# Altium PCB Holder_Accu_Simetric.PcbDoc
Units mm, origin at the board's own origin, x right, y up, seen from the top; angles counter-clockwise.
Board outline 356.65 x 138 mm, 2 copper layers (Top Layer, Bottom Layer); 22 components, 17 nets, 105 pads, 29 vias.
Unrouted connection lines stored in the file: 15.
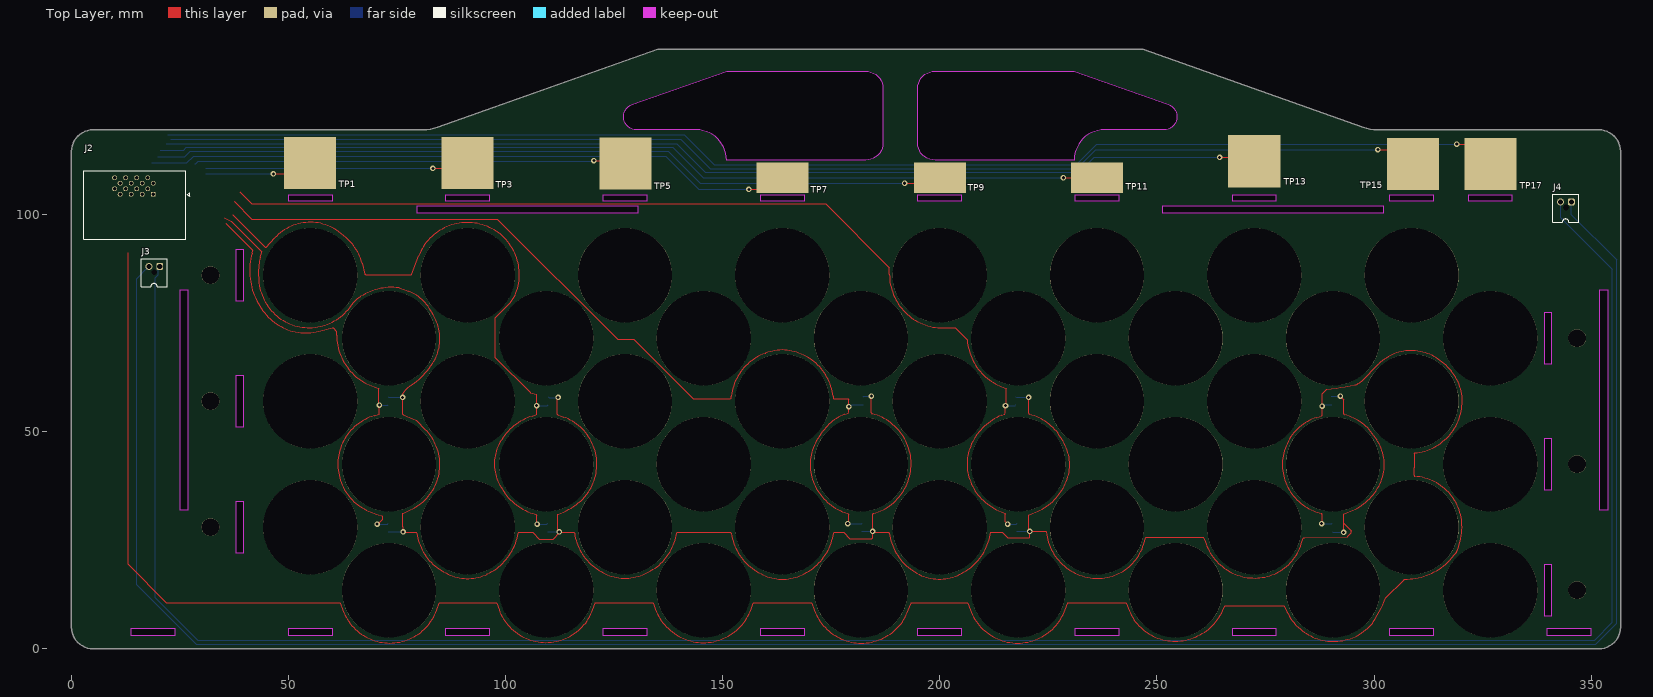
[diagram p0: Top Layer view]
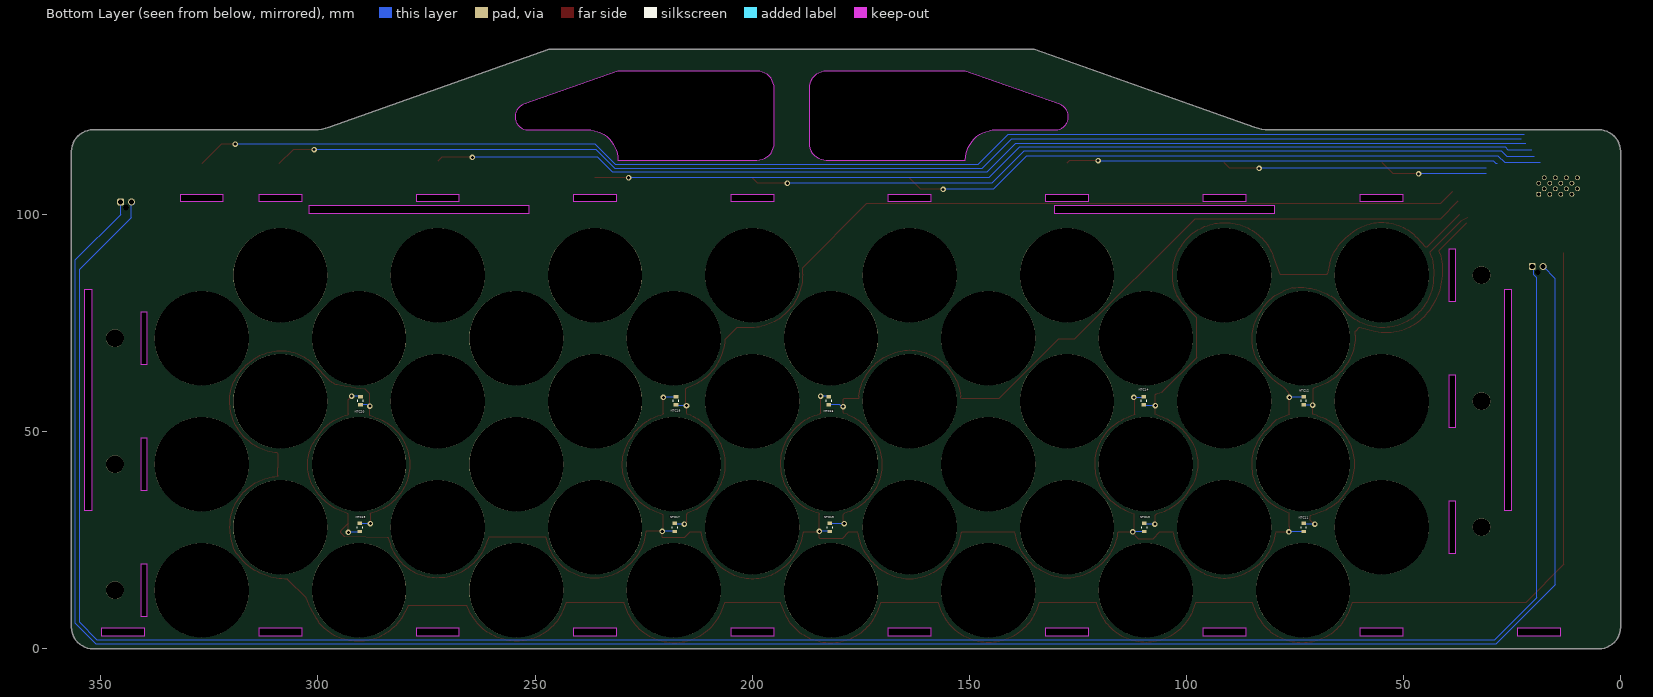
[diagram p1: Bottom Layer view, seen from below]
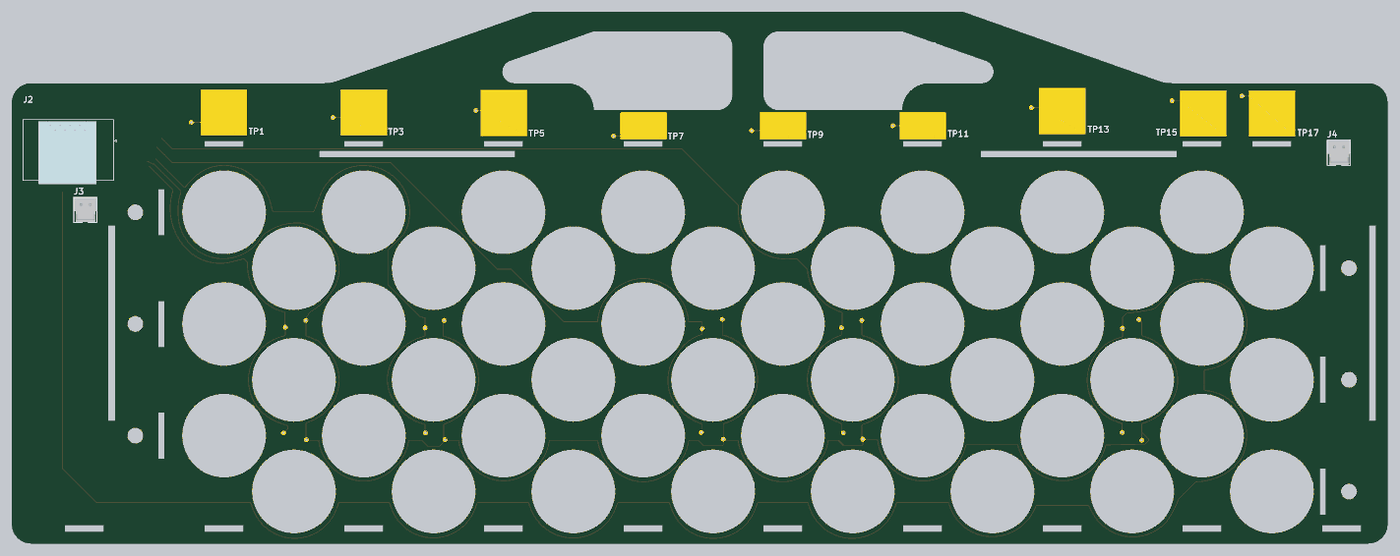
[diagram p2: 3D render of the assembled board from above, using the file's embedded part models]
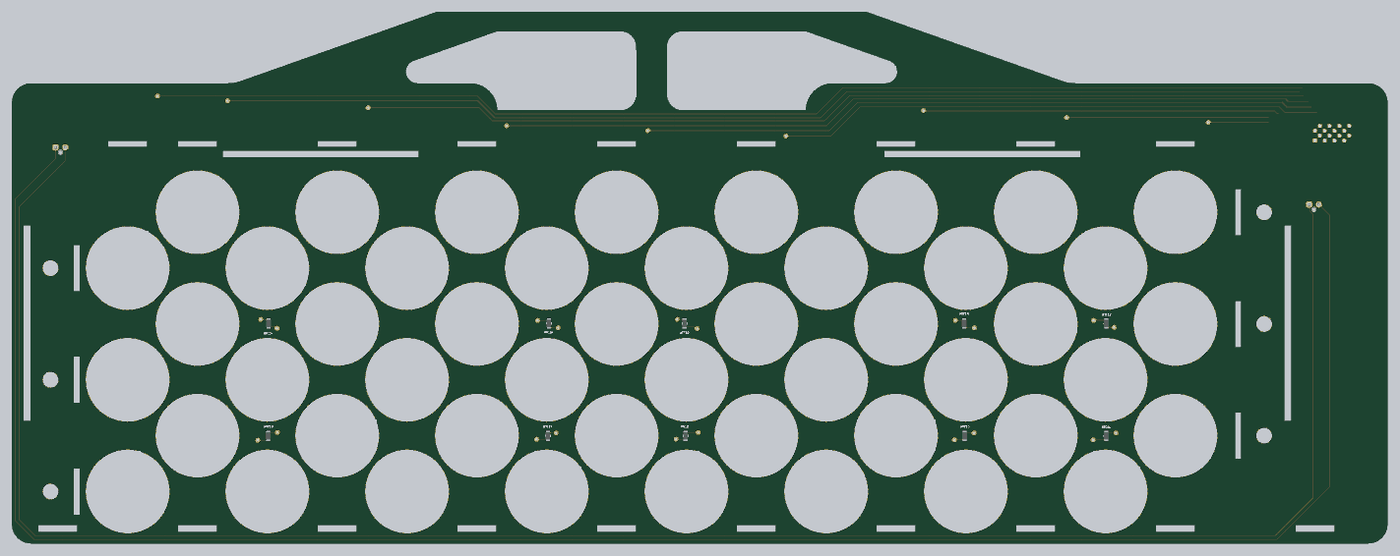
[diagram p3: 3D render of the assembled board from below, using the file's embedded part models]

## Layer stack, top to bottom
Top Solder: solder mask 0.0102, Solder Resist, Dk 3.5
Top Layer: signal copper 0.0356
Dielectric 1: dielectric 0.32, FR-4, Dk 4.8
Bottom Layer: signal copper 0.0356
Bottom Solder: solder mask 0.0102, Solder Resist, Dk 3.5

## Board outline
135.069,138 84.402,120.073 83.59,119.824 82.759,119.644 81.916,119.536 81.067,119.5 5.092,119.5 4.44,119.457 3.798,119.33 3.179,119.119 2.592,118.83 2.049,118.467 1.557,118.036 1.126,117.544 0.762,117 0.473,116.413 0.263,115.794 0.135,115.153 0.092,114.5 0.092,5 0.135,4.347 0.263,3.706 0.473,3.087 0.762,2.5 1.126,1.956 1.557,1.464 2.049,1.033 2.592,0.67 3.179,0.381 3.798,0.17 4.44,0.043 5.092,0 351.743,0 352.396,0.043 353.037,0.17 353.656,0.381 354.243,0.67 354.787,1.033 355.278,1.464 355.71,1.956 356.073,2.5 356.362,3.087 356.573,3.706 356.7,4.347 356.743,5 356.743,114.5 356.7,115.153 356.573,115.794 356.362,116.413 356.073,117 355.71,117.544 355.278,118.036 354.787,118.467 354.243,118.83 353.656,119.119 353.037,119.33 352.396,119.457 351.743,119.5 300.769,119.5 299.92,119.536 299.077,119.644 298.246,119.824 297.433,120.073 246.766,138
cut-out: 50.092,4.75 60.092,4.75 60.092,3 50.092,3
cut-out: 303.632,3 303.632,4.75 313.632,4.75 313.632,3
cut-out: 340.743,7.5 339.243,7.5 339.243,19.5 340.743,19.5
cut-out: 39.592,22 38.092,22 38.092,34 39.592,34
cut-out: 340.743,36.5 339.243,36.5 339.243,48.5 340.743,48.5
cut-out: 39.592,51 38.092,51 38.092,63 39.592,63
cut-out: 339.852,4.75 349.852,4.75 349.852,3 339.852,3
cut-out: 267.412,4.75 277.412,4.75 277.412,3 267.412,3
cut-out: 194.972,4.75 204.972,4.75 204.972,3 194.972,3
cut-out: 122.532,4.75 132.532,4.75 132.532,3 122.532,3
cut-out: 25.092,31.875 25.092,82.625 26.842,82.625 26.842,31.875
cut-out: 302.118,102 302.118,100.25 251.368,100.25 251.368,102
cut-out: 79.717,102 130.467,102 130.467,100.25 79.717,100.25
cut-out: 351.993,82.625 353.743,82.625 353.743,31.875 351.993,31.875
cut-out: 50.092,104.5 60.092,104.5 60.092,103 50.092,103
cut-out: 86.312,104.5 96.312,104.5 96.312,103 86.312,103
cut-out: 122.532,104.5 132.532,104.5 132.532,103 122.532,103
cut-out: 158.752,104.5 168.752,104.5 168.752,103 158.752,103
cut-out: 231.192,104.5 241.192,104.5 241.192,103 231.192,103
cut-out: 267.412,104.5 277.412,104.5 277.412,103 267.412,103
cut-out: 303.632,104.5 313.632,104.5 313.632,103 303.632,103
cut-out: 339.243,77.5 340.743,77.5 340.743,65.5 339.243,65.5
cut-out: 38.092,92 39.592,92 39.592,80 38.092,80
cut-out: 241.192,4.75 241.192,3 231.192,3 231.192,4.75
cut-out: 168.752,4.75 168.752,3 158.752,3 158.752,4.75
cut-out: 96.312,4.75 96.312,3 86.312,3 86.312,4.75
cut-out: 23.872,4.75 23.872,3 13.872,3 13.872,4.75
cut-out: 321.743,104.5 331.743,104.5 331.743,103 321.743,103
cut-out: 194.972,104.5 204.972,104.5 204.972,103 194.972,103
cut-out: 186.918,129 186.918,116.5 186.868,115.874 186.722,115.264 186.482,114.684 186.154,114.149 185.746,113.672 185.269,113.264 184.734,112.936 184.154,112.696 183.543,112.549 182.918,112.5 150.918,112.5 150.874,113.284 150.742,114.058 150.525,114.812 150.225,115.537 149.845,116.224 149.391,116.864 148.867,117.45 148.282,117.973 147.642,118.427 146.955,118.807 146.23,119.107 145.475,119.324 144.701,119.456 143.918,119.5 130.236,119.5 129.715,119.546 129.21,119.681 128.736,119.902 128.308,120.202 127.938,120.572 127.638,121 127.417,121.474 127.281,121.979 127.236,122.5 127.282,123.025 127.419,123.533 127.644,124.01 127.948,124.44 128.322,124.81 128.756,125.11 129.235,125.328 150.918,133 182.918,133 183.543,132.951 184.154,132.804 184.734,132.564 185.269,132.236 185.746,131.828 186.154,131.351 186.482,130.816 186.722,130.236 186.868,129.626
cut-out: 230.918,112.5 198.918,112.5 198.292,112.549 197.682,112.696 197.102,112.936 196.567,113.264 196.089,113.672 195.682,114.149 195.354,114.684 195.113,115.264 194.967,115.874 194.918,116.5 194.918,129 194.967,129.626 195.113,130.236 195.354,130.816 195.682,131.351 196.089,131.828 196.567,132.236 197.102,132.564 197.682,132.804 198.292,132.951 198.918,133 230.918,133 252.6,125.328 253.078,125.111 253.51,124.813 253.884,124.445 254.187,124.017 254.412,123.543 254.551,123.038 254.6,122.515 254.556,121.992 254.423,121.485 254.203,121.009 253.903,120.578 253.533,120.206 253.104,119.904 252.629,119.682 252.122,119.546 251.6,119.5 237.918,119.5 237.134,119.456 236.36,119.324 235.606,119.107 234.881,118.807 234.193,118.427 233.553,117.973 232.968,117.45 232.445,116.864 231.991,116.224 231.611,115.537 231.311,114.812 231.093,114.058 230.962,113.284

## Design rules (kind name [scope] priority, off if disabled: settings)
Clearance [All] p1: gap=0.2 ignorepadtopadclearanceinfootprint=FALSE
DiffPairsRouting [All] p1: maxlimit=0.2 minlimit=0.2 mostfreqgap=0.2 toplayer_minwidth=0.2 toplayer_maxwidth=0.2 toplayer_prefwidth=0.2 bottomlayer_minwidth=0.2 bottomlayer_maxwidth=0.2 bottomlayer_prefwidth=0.2 maxuncoupledlength=12.7
PolygonConnect [All] p1: connectstyle=Relief reliefconductorwidth=0.254 reliefentries=4 polygonreliefangle="90 Angle" airgapwidth=0.254
RoutingVias [All] p1: holewidth=0.711 width=1.27 viastyle="Through Hole" minholewidth=0.711 minwidth=1.27 maxholewidth=0.711 maxwidth=1.27
SolderMaskExpansion [All] p1: expansion=0.102 istentingtop=FALSE
SupplyNets "Schematic Supply Nets" [InNet('GND')] p1: voltage=0.000
UnRoutedNet [All] p1: checkbadconnections=TRUE
Width [All] p1: maxlimit=0.2 minlimit=0.2 preferedwidth=0.2
28 further rules are at their usual default settings.

## Components (designator, comment, footprint, x,y, rotation, side; value= is the part's Value field where it differs from the comment)
J2 "459850121" MOLEX_459850121 18.923,104.648 r0 top
J3 "J_Nanofit_1x2_V" J_NanoFit_1X2_V#1 20.427,88.031 r0 top
J4 "J_Nanofit_1x2_V" J_NanoFit_1X2_V#2 345.42,102.89 r0 top
NTC11 "NTC_0805" NTC_0805 73.025,27.94 r270 bottom
NTC12 "NTC_0805" NTC_0805 73.025,57.15 r90 bottom
NTC13 "NTC_0805" NTC_0805 109.728,27.94 r270 bottom
NTC14 "NTC_0805" NTC_0805 109.855,57.15 r90 bottom
NTC15 "NTC_0805" NTC_0805 182.118,27.94 r270 bottom
NTC16 "NTC_0805" NTC_0805 182.372,57.15 r90 bottom
NTC17 "NTC_0805" NTC_0805 217.805,27.94 r270 bottom
NTC18 "NTC_0805" NTC_0805 217.551,57.15 r90 bottom
NTC19 "NTC_0805" NTC_0805 290.322,27.94 r270 bottom
NTC20 "NTC_0805" NTC_0805 290.195,57.15 r90 bottom
TP1 "Test Point" TESTPOINT_WIDE#1 54.991,111.887 r0 top
TP3 "Test Point" TESTPOINT_WIDE#1 91.313,111.887 r0 top
TP5 "Test Point" TESTPOINT_WIDE#1 127.635,111.76 r0 top
TP7 "Test Point" TESTPOINT_WIDE#2 163.83,108.458 r0 top
TP9 "Test Point" TESTPOINT_WIDE#2 200.025,108.458 r0 top
TP11 "Test Point" TESTPOINT_WIDE#2 236.22,108.458 r0 top
TP13 "Test Point" TESTPOINT_WIDE#1 272.415,112.268 r0 top
TP15 "Test Point" TESTPOINT_WIDE#1 308.991,111.633 r0 top
TP17 "Test Point" TESTPOINT_WIDE#1 326.771,111.633 r0 top

## Footprints (in the part's own frame and the unit in brackets; to place one, negate y for a bottom-side part, rotate by r counter-clockwise, add the part's x,y. Pads: shape width x height; smd on the part's side, far side on the other; paste and mask are expansions set on the pad)
J_NanoFit_1X2_V#1 [mm]
  rrect50% 1.6x1.6 hole 1.2: 1(0,0)
  round 1.6 hole 1.2: 2(-2.5,0)
  round 0 hole 1.3: 3(-1.25,-1.29)
  Bottom Layer lines w1: -2.827,-0.165 -2.777,-0.115 -2.615,-0.115 -2.5,-0.115 -2.474,-0.115 -2.424,-0.165
  silkscreen extent -4.3,-4.7 1.73,1.81, body extent -4.22,-4.59 1.72,1.75, height 10.58
J_NanoFit_1X2_V#2 [mm]
  rrect50% 1.6x1.6 hole 1.2: 1(0,0)
  round 1.6 hole 1.2: 2(-2.5,0)
  round 0 hole 1.3: 3(-1.25,-1.29)
  Bottom Layer lines w1: -2.827,-0.165 -2.777,-0.115 -2.5,-0.115 -2.474,-0.115 -2.424,-0.165
  silkscreen extent -4.3,-4.7 1.73,1.81, body extent -4.22,-4.59 1.72,1.75, height 10.58
MOLEX_459850121 [mm]
  rect 1.11x1.11 / inner round 1.11 / far side rect 1.11x1.11 hole 0.76 mask+0.076: 1(0,0)
  round 1.11 hole 0.76 mask+0.076: 2(-1.27,1.27) 3(-2.54,0) 4(-3.81,1.27) 5(-5.08,0) 6(-6.35,1.27) 7(-7.62,0) 8(-8.89,1.27) 9(0,2.54) 10(-1.27,3.81) 11(-2.54,2.54) 12(-3.81,3.81) 13(-5.08,2.54) 14(-6.35,3.81) 15(-7.62,2.54) 16(-8.89,3.81)
  silkscreen extent -15.99,-10.4 8.38,5.38, body extent -11.94,-11.32 3.08,4.97, height 7.49
NTC_0805 [mm]
  rect 0.8x1.05 smd: 1(-0.925,0) 2(0.925,0)
  silkscreen extent -0.21,-0.63 0.21,0.63, body extent -1,-0.6 1,0.6, height 1.3
TESTPOINT_WIDE#1 [mm]
  rect 12x12 smd paste-2539.97: 1(0,0)
TESTPOINT_WIDE#2 [mm]
  rect 12x7 smd paste-2539.97: 1(0,0)

## Part data
J2: Package=None, Availability=Unavailable, MP=459850121, Price=None
J3 J4: "Nano-Fit Vertical Header, Through Hole, 2.50mm Pitch, Single Row, 2 Circuits, with Kinked Pins, Tin (Sn) Plating,...", Manufacturer=Molex, Manufacturer part number=1053092202, Supplier Part Number 1=538-105309-2202, Pricing 1="1=1,09, 10=0,839, 50=0,839, 100=0,686, 1000=0,571, 10000=0,507 (USD)", RoHS=No, Stock 1=6299, Supplier 1=Mouser
NTC11 NTC12 NTC13 NTC14 NTC15 NTC16 NTC17 NTC18 NTC19 NTC20: "NTC Thermistor 10k 0805 (2012 Metric)", Package="0805 TDK", Check_prices=https://www.snapeda.com/parts/NTCG203NH103JTDS/TDK/view-part/?ref=eda, MF="TDK Corporation", MP=NTCG203NH103JTDS, SnapEDA_Link=https://www.snapeda.com/parts/NTCG203NH103JTDS/TDK/view-part/?ref=snap
TP1 TP3 TP5 TP7 TP9 TP11 TP13 TP15 TP17: library part TestPoint_Wide, "TestPoint 5x5mm"

## Free pads (board coordinates)
  round 4.1 hole 4.1: 1(32.092,28) 1(32.092,57) 1(32.092,86) 1(346.743,13.5) 1(346.743,42.5) 1(346.743,71.5)
  round 21.7 hole 21.7: 1(55.092,28) 1(55.092,57) 1(55.092,86) 1(73.203,13.5) 1(73.203,42.5) 1(73.203,71.5) 1(91.312,28) 1(91.312,57) 1(91.312,86) 1(109.423,13.5) 1(109.423,42.5) 1(109.423,71.5) 1(127.532,28) 1(127.532,57) 1(127.532,86) 1(145.643,13.5) 1(145.643,42.5) 1(145.643,71.5) 1(163.752,28) 1(163.752,57) 1(163.752,86) 1(181.863,13.5) 1(181.863,42.5) 1(181.863,71.5) 1(199.972,28) 1(199.972,57) 1(199.972,86) 1(218.083,13.5) 1(218.083,42.5) 1(218.083,71.5) 1(236.192,28) 1(236.192,57) 1(236.192,86) 1(254.303,13.5) 1(254.303,42.5) 1(254.303,71.5) 1(272.412,28) 1(272.412,57) 1(272.412,86) 1(290.523,13.5) 1(290.523,42.5) 1(290.523,71.5) 1(308.632,28) 1(308.632,57) 1(308.632,86) 1(326.743,13.5) 1(326.743,42.5) 1(326.743,71.5)

## Via types
v1: diameter 1.27, hole 0.711, Top Layer to Bottom Layer, 29 vias

## Nets (pads, with @x,y where several pads share a name; then routed paths per layer and width w, separated by ;. In a path a pad name is that pad's centre, name@x,y a point inside that pad or via, vN(x,y) a via of type N, cw(c..) or ccw(c..) an arc to the next point about the centre after c; other vN are vias at no path point)
GND: J2.15 NTC11.2 NTC12.2 NTC13.2 NTC14.2 NTC15.2 NTC16.2 NTC17.2 NTC18.2 NTC19.2 NTC20.2 | length 607.6
  Top Layer w0.2: 35.268,99.225 36.86,98.479 43.88,91.458 43.893,91.446 43.893,91.235 43.587,90.126 ccw(c54.371,87.157) 43.313,88.84 ccw(c58.383,86.546) 43.182,85.41 ccw(c54.835,85.6) 64.135,78.576 64.632,79.234 64.642,79.246 64.643,79.248 65.12,79.854 65.895,80.628 65.913,80.64 66.706,81.143 cw(c73.875,69.851) 75.539,83.123 cw(c75.506,82.871) 75.594,83.109 75.595,83.109 77.709,82.317 77.725,82.311 cw(c74.373,73.396) 82.202,78.82 cw(c58.287,62.813) 83.746,76.23 cw(c74.585,71.4) 83.261,65.747 83.258,65.741 cw(c67.71,75.878) 80.574,62.499 cw(c68.823,74.72) 78.11,60.536 77.492,60.131 cw(c59.986,74.126) 76.327,58.787 v1(76.327,57.912) 76.327,54.031 76.401,53.957 76.435,53.923 79.502,52.578 81.586,50.494 cw(c73.531,42.438) 78.104,32.004 76.435,31.272 76.327,31.164 76.327,28.067 76.327,27.857 76.454,27.134 v1(76.454,26.924) 76.581,26.797 79.399,26.797 79.473,26.797 79.622,26.648 ccw(c91.456,28.244) 86.23,17.507 86.812,17.224 ccw(c91.309,26.459) 95.809,17.226 95.843,17.242 ccw(c90.569,28.622) 102.955,26.648 103.104,26.797 106.253,26.797 107.777,25.273 111.028,25.273 112.552,26.797 115.702,26.797 115.776,26.797 115.925,26.648 ccw(c127.711,28.236) 122.507,17.542 122.982,17.311 ccw(c127.536,26.668) 132.089,17.311 132.977,17.743 ccw(c127.886,28.206) 139.416,26.648 139.565,26.797 151.744,26.797 151.815,26.797 151.964,26.648 152.109,25.944 ccw(c164.292,28.462) 158.851,17.274 159.293,17.059 ccw(c163.784,26.287) 168.811,17.341 ccw(c163.491,28.275) 175.541,26.648 175.69,26.797 177.926,26.797 179.323,25.4 184.382,25.4 184.531,25.549 v1(184.531,27.051) ; v1(112.141,57.912) 111.887,57.658 111.887,53.975 112.002,53.86 113.385,53.368 113.395,53.364 cw(c109.563,42.513) 119.148,36.145 119.143,36.138 118.264,34.983 cw(c107.004,45.521) 118.255,34.974 cw(c107.004,45.521) 112.129,30.976 112.089,30.936 112.014,30.861 112.014,27.305 v1(112.395,26.924) ; v1(184.277,58.166) 184.277,54.354 184.277,54.304 184.296,54.258 ccw(c184.531,54.354) 184.466,54.108 cw(c181.513,42.571) 193.421,42.672 cw(c181.591,42.572) 184.717,31.162 ccw(c184.785,30.917) 184.548,31.007 184.531,30.964 184.531,30.917 v1(184.531,27.051) ; v1(220.472,57.912) 220.472,54.234 220.472,54.183 220.492,54.136 ccw(c220.726,54.234) 220.663,53.988 cw(c217.795,42.591) 227.571,49.114 ; 227.571,49.114 228.128,48.27 cw(c219.228,42.387) 228.129,36.505 227.91,36.174 cw(c217.441,43.093) 221.426,31.193 220.621,30.924 220.472,30.775 220.472,30.724 220.472,27.305 v1(220.726,27.051) ; v1(292.227,58.166) 292.989,57.404 292.989,54.139 292.989,54.089 293.008,54.043 ccw(c293.243,54.139) 293.178,53.893 cw(c290.239,42.535) 299.953,49.113 300.588,48.167 cw(c291.964,42.387) 300.588,36.607 300.458,36.413 cw(c289.829,43.536) 293.966,31.428 293.138,31.145 292.989,30.997 292.989,30.947 292.989,28.872 ; v1(292.989,26.797) 292.989,28.872 ; v1(184.531,27.051) 184.785,26.797 188.154,26.797 188.228,26.797 188.317,26.709 188.377,26.648 ccw(c200.713,28.31) 195.267,17.117 ccw(c199.915,26.685) 204.57,17.121 ccw(c198.792,28.996) 209.55,21.337 ccw(c199.447,28.53) 211.635,26.234 211.741,26.797 214.368,26.797 215.638,25.527 220.577,25.527 220.726,25.676 v1(220.726,27.051) ; v1(220.726,27.051) 224.28,27.051 224.359,27.051 224.508,26.902 224.604,26.304 ccw(c236.438,28.211) 235.213,16.288 ccw(c236.348,27.338) 246.955,24.038 247.421,25.535 247.466,25.58 247.54,25.654 260.638,25.654 260.691,25.654 260.839,25.505 261.11,24.661 ccw(c272.567,28.333) 272.6,16.303 ccw(c272.569,27.524) 283.274,24.159 283.686,25.472 283.73,25.516 283.805,25.591 284.03,25.591 293.872,25.791 293.944,25.863 293.947,25.867 293.951,25.871 294.767,26.756 294.767,27.094 294.693,27.168 292.989,28.872
  Bottom Layer w0.2: NTC11.2@73.116,26.924 v1(76.454,26.924) ; NTC13.2@109.819,26.924 v1(112.395,26.924) ; NTC14.2@110.128,57.802 v1@112.031,57.802 ; NTC15.2@182.154,27.051 v1(184.531,27.051) ; NTC16.2@182.463,58.166 v1(184.277,58.166) ; NTC18.2@217.714,57.912 v1(220.472,57.912) ; NTC17.2@217.841,27.051 v1(220.726,27.051) ; NTC20.2@290.286,58.166 v1(292.227,58.166) ; NTC19.2@290.54,26.797 v1(292.989,26.797)
  Bottom Layer w0.254: NTC11.2 NTC11.2@73.116,26.924 ; NTC12.2 73.188,57.912 v1(76.327,57.912) ; NTC13.2 NTC13.2@109.819,26.924 ; NTC14.2 NTC14.2@110.128,57.802 ; v1@112.031,57.802 v1(112.141,57.912) ; NTC15.2 NTC15.2@182.154,27.051 ; NTC16.2 NTC16.2@182.463,58.166 ; NTC18.2 NTC18.2@217.714,57.912 ; NTC17.2 NTC17.2@217.841,27.051 ; NTC20.2 NTC20.2@290.286,58.166 ; NTC19.2 NTC19.2@290.54,26.797
IP: J3.2 J4.1 | length 524.3
  Bottom Layer w0.2: J3.2 17.812,87.916 15.113,85.217 15.113,14.732 28.829,1.016 351.028,1.016 355.854,5.842 355.854,89.535 345.42,99.969 J4.1
NetJ2_1: J2.1 TP1.1 | length 25.1
  Top Layer w0.254: v1(46.609,109.347) 52.451,109.347 TP1.1
  Bottom Layer w0.2: 30.988,109.347 v1(46.609,109.347)
NetJ2_2: J2.2 TP3.1 | length 60.9
  Top Layer w0.2: v1(83.312,110.617) TP3.1@90.043,110.617
  Top Layer w0.254: TP3.1@90.043,110.617 TP3.1
  Bottom Layer w0.2: 30.988,110.617 v1(83.312,110.617)
NetJ2_3: J2.3 TP5.1 | length 99.8
  Top Layer w0.2: v1(120.396,112.395) TP5.1@127,112.395
  Top Layer w0.254: TP5.1@127,112.395 TP5.1
  Bottom Layer w0.2: 28.448,111.633 28.694,111.633 29.329,112.268 120.269,112.268 v1(120.396,112.395)
NetJ2_4: J2.4 TP7.1 | length 150.2
  Top Layer w0.2: v1(156.083,105.791) TP7.1@161.163,105.791
  Top Layer w0.254: TP7.1@161.163,105.791 TP7.1
  Bottom Layer w0.2: 18.542,111.887 26.67,111.887 28.194,113.411 136.906,113.411 144.526,105.791 v1(156.083,105.791)
NetJ2_5: J2.5 TP9.1 | length 184.2
  Top Layer w0.2: v1(191.897,107.188) TP9.1@198.755,107.188
  Top Layer w0.254: TP9.1@198.755,107.188 TP9.1
  Bottom Layer w0.2: 27.432,114.554 137.541,114.554 144.907,107.188 v1(191.897,107.188)
  Bottom Layer w0.254: 19.939,113.284 26.162,113.284 27.432,114.554
NetJ2_6: J2.6 TP11.1 | length 218.8
  Top Layer w0.2: v1(228.473,108.458) TP11.1
  Bottom Layer w0.2: 20.574,114.808 25.908,114.808 26.543,115.443 138.557,115.443 145.542,108.458 v1(228.473,108.458)
NetJ2_7: J2.7 TP13.1 | length 255.1
  Top Layer w0.2: v1(264.414,113.157) TP13.1@271.526,113.157
  Top Layer w0.254: TP13.1@271.526,113.157 TP13.1
  Bottom Layer w0.2: 21.971,116.332 139.424,116.332 146.028,109.728 232.156,109.728
  Bottom Layer w0.254: 21.909,116.27 21.971,116.332 ; 232.156,109.728 235.585,113.157 v1(264.414,113.157)
NetJ2_8: J2.8 TP15.1 | length 292.1
  Top Layer w0.2: v1(300.863,114.935) TP15.1@305.689,114.935
  Top Layer w0.254: TP15.1@305.689,114.935 TP15.1
  Bottom Layer w0.2: 22.987,117.348 140.335,117.348 147.193,110.49 231.521,110.49
  Bottom Layer w0.254: 231.521,110.49 235.966,114.935 v1(300.863,114.935)
NetJ2_9: J2.9 NTC11.1 NTC12.1 | length 106.4
  Top Layer w0.2: 35.633,97.971 41.821,91.783 41.821,91.6 41.685,91.117 ccw(c56.338,87.01) 45.443,76.386 ccw(c54.073,84.801) 57.011,73.111 60.133,73.896 60.343,73.896 60.352,73.887 61.107,73.132 61.161,73.078 61.161,72.241 ccw(c73.672,72.236) 69.777,60.347 70.708,60.042 70.751,59.999 70.825,59.924 70.825,56.302 v1(70.993,56.134) 70.993,54.097 70.919,54.023 70.873,53.977 69.818,53.669 ccw(c73.092,42.461) 68.552,31.703 ccw(c82.715,65.261) 71.52,30.6 71.637,30.482 71.637,29.727 70.612,28.702 v1(70.485,28.702)
  Bottom Layer w0.2: v1(70.485,28.702) NTC11.1@72.862,28.702
  Bottom Layer w0.254: v1(70.993,56.134) 72.934,56.134 NTC12.1 ; NTC11.1@72.862,28.702 NTC11.1
NetJ2_10: J2.10 NTC13.1 NTC14.1 | length 168.7
  Top Layer w0.2: 37.275,99.885 44.661,92.499 44.72,92.44 44.886,92.44 44.947,92.501 46.916,94.625 cw(c55.081,87.055) 61.619,96.069 cw(c49.927,79.952) 63.921,94.116 cw(c55.696,85.791) 67.005,88.8 ; 67.005,88.8 67.672,86.295 67.689,86.229 67.812,86.106 78.29,86.106 78.402,86.218 80.037,90.465 cw(c91.234,86.155) 102.431,81.848 cw(c95.697,84.438) 100.799,79.336 97.663,76.2 97.663,70.92 97.663,67.056 105.692,59.027 105.738,58.981 107.068,58.589 107.114,58.543 107.188,58.469 v1(107.188,56.007) 107.188,53.989 107.039,53.841 106.237,53.591 ; 106.237,53.591 ccw(c110.115,41.135) 99.134,48.177 99.012,47.987 ccw(c107.438,42.588) 99.014,37.186 99.608,36.26 ccw(c109.916,42.87) 106.252,31.186 107.039,30.939 107.188,30.79 107.188,30.736 107.188,28.829 v1(107.315,28.702)
  Bottom Layer w0.2: v1(107.188,56.007) NTC14.1@109.637,56.007 ; v1(107.315,28.702) NTC13.1@109.565,28.702
  Bottom Layer w0.254: NTC13.1@109.565,28.702 NTC13.1 ; NTC14.1@109.637,56.007 NTC14.1
NetJ2_11: J2.11 NTC15.1 NTC16.1 | length 215.8
  Top Layer w0.2: 37.592,102.997 41.656,98.933 98.171,98.933 125.857,71.247 129.54,71.247 143.147,57.64 143.222,57.565 151.715,57.565 151.802,57.565 151.951,57.714 152.009,58.209 cw(c163.885,56.805) 159.828,68.054 159.887,68.076 cw(c163.727,58.397) 167.568,68.075 cw(c163.565,56.805) 175.442,58.209 175.501,57.714 175.649,57.565 175.737,57.565 178.921,57.565 178.996,57.491 179.07,57.417 v1(179.07,55.753) ; v1(178.816,28.829) 179.065,29.078 179.065,30.883 179.065,30.927 178.916,31.076 178.075,31.397 cw(c182.641,43.343) 172.207,35.948 cw(c181.296,42.388) 172.207,48.829 173.065,50.04 cw(c182.15,43.602) 178.114,53.979 178.916,54.291 179.065,54.44 v1@179.065,55.753
  Bottom Layer w0.2: v1(178.816,28.829) NTC15.1@182.082,28.829 ; v1(179.07,55.753) 179.345,55.753 179.817,56.225 NTC16.1
  Bottom Layer w0.254: NTC15.1@182.082,28.829 NTC15.1
NetJ2_12: J2.12 NTC17.1 NTC18.1 | length 243.9
  Top Layer w0.2: 38.862,105.283 41.656,102.489 173.736,102.489 188.432,87.793 188.423,86.238 ccw(c200.719,86.165) 200.792,73.869 203.433,73.885 203.538,73.885 206.245,71.238 206.313,71.17 206.318,71.111 ccw(c219.226,72.199) 209.296,63.881 ccw(c218.354,71.468) 214.321,60.362 215.218,60.037 215.367,59.888 215.367,59.842 215.367,56.236 v1(215.138,56.007) 215.138,54.211 214.989,54.063 214.158,53.727 ccw(c218.892,42.021) 208.667,49.429 208.426,49.097 208.426,49.096 ccw(c217.465,42.545) 208.426,35.994 ccw(c218.938,43.612) 214.126,31.554 214.989,31.21 215.138,31.061 215.138,31.019 215.138,29.21 v1(215.646,28.702)
  Bottom Layer w0.2: v1(215.138,56.007) NTC18.1@217.333,56.007 ; v1(215.646,28.702) NTC17.1@217.642,28.702
  Bottom Layer w0.254: NTC18.1@217.333,56.007 NTC18.1 ; NTC17.1@217.642,28.702 NTC17.1
NetJ2_13: J2.13 NTC19.1 NTC20.1 | length 577
  Top Layer w0.2: 13.208,91.231 13.208,19.431 21.971,10.668 61.884,10.668 61.998,10.554 62.606,8.891 ccw(c73.404,12.834) 84.201,8.889 84.809,10.554 84.849,10.594 84.923,10.668 97.854,10.668 97.968,10.554 98.529,9.02 ccw(c109.336,12.964) 120.141,9.014 120.704,10.554 120.743,10.594 120.818,10.668 133.922,10.668 134.036,10.554 134.551,9.145 ccw(c145.571,13.169) 156.59,9.142 157.106,10.554 157.146,10.594 157.22,10.668 170.418,10.668 170.532,10.554 171.142,8.883 ccw(c181.963,12.845) 192.784,8.885 193.394,10.554 193.434,10.594 193.508,10.668 206.325,10.668 206.439,10.554 207.02,8.963 ccw(c217.938,12.95) 228.855,8.96 229.438,10.554 229.477,10.594 229.552,10.668 242.808,10.668 242.922,10.554 243.367,9.337 ccw(c254.175,13.285) 254.254,1.778 ccw(c254.171,13.914) 265.158,8.759 265.627,9.757 265.775,9.906 279.16,9.906 279.183,9.906 279.332,9.757 279.926,8.569 ccw(c294.308,15.757) 281.178,6.477 ccw(c287.917,11.24) 282.468,5.043 282.525,4.992 ccw(c290.669,13.467) 298.981,5.156 ccw(c294.268,9.87) 299.847,6.223 ccw(c274.718,22.647) 302.68,11.723 302.718,11.761 306.921,15.964 306.995,16.038 ccw(c306.995,30.936) 317.009,19.906 317.307,20.291 cw(c336.739,5.298) 318.915,22.172 ccw(c318.73,22.346) 318.962,22.242 ccw(c305.15,28.344) 320.218,27.36 ccw(c308.615,28.118) 309.368,39.721 309.321,39.757 cw(c309.473,39.96) 309.276,39.8 309.219,39.87 309.219,39.96 309.219,41.686 309.219,44.872 309.219,44.956 309.368,45.104 ccw(c308.284,57.066) 320.294,57.066 320.294,58.107 ccw(c320.04,58.107) 320.292,58.139 ccw(c309.06,56.675) 317.769,63.917 317.708,63.991 ccw(c308.34,56.938) 309.512,68.605 ccw(c308.467,58.199) 301.065,65.588 297.135,61.652 ; v1(287.909,28.829) 287.909,30.967 287.909,31.072 287.793,31.188 286.609,31.59 cw(c290.285,42.399) 286.762,53.26 287.918,53.635 287.962,53.678 288.036,53.752 v1(288.036,55.88) 288.036,58.757 289.06,59.781 ccw(c283.961,114.726) 295.551,60.776 ccw(c294.894,63.835) 297.135,61.652
  Bottom Layer w0.2: v1(287.909,28.829) NTC19.1@290.286,28.829 ; 288.656,56.225 NTC20.1
  Bottom Layer w0.254: v1(288.036,55.88) 288.311,55.88 288.656,56.225 ; NTC19.1@290.286,28.829 NTC19.1
NetJ2_16: J2.16 TP17.1 | length 311.2
  Top Layer w0.2: v1(319.024,116.205) TP17.1@322.199,116.205
  Top Layer w0.254: TP17.1@322.199,116.205 TP17.1
  Bottom Layer w0.2: 22.225,118.364 141.224,118.364 148.082,111.506 231.394,111.506 236.093,116.205 v1(319.024,116.205)
NetJ3_1: J3.1 J4.2 | length 519.5
  Bottom Layer w0.2: J3.1 20.127,87.731 20.127,86.167 19.431,85.471 19.431,11.811 29.21,2.032 350.774,2.032 354.838,6.096 354.838,87.376 342.92,99.294 342.92,102.775 J4.2
pads on no net: J2.14 J3.3 J4.3

## Text inside footprints (layer, text, board x,y; h text height)
J2: Mechanical 13 "PTH D0.76 +/- 0.05" at 3.223,113.023 h0.5